# Altium PCB ESP01-S-UART_Version_1.PcbDoc
Units mm, origin at the board's own origin, x right, y up, seen from the top; angles counter-clockwise.
Board outline 45 x 45 mm, 2 copper layers (Top Layer, Bottom Layer), stack 0.97 mm thick; 62 components, 41 nets, 180 pads, 277 vias.
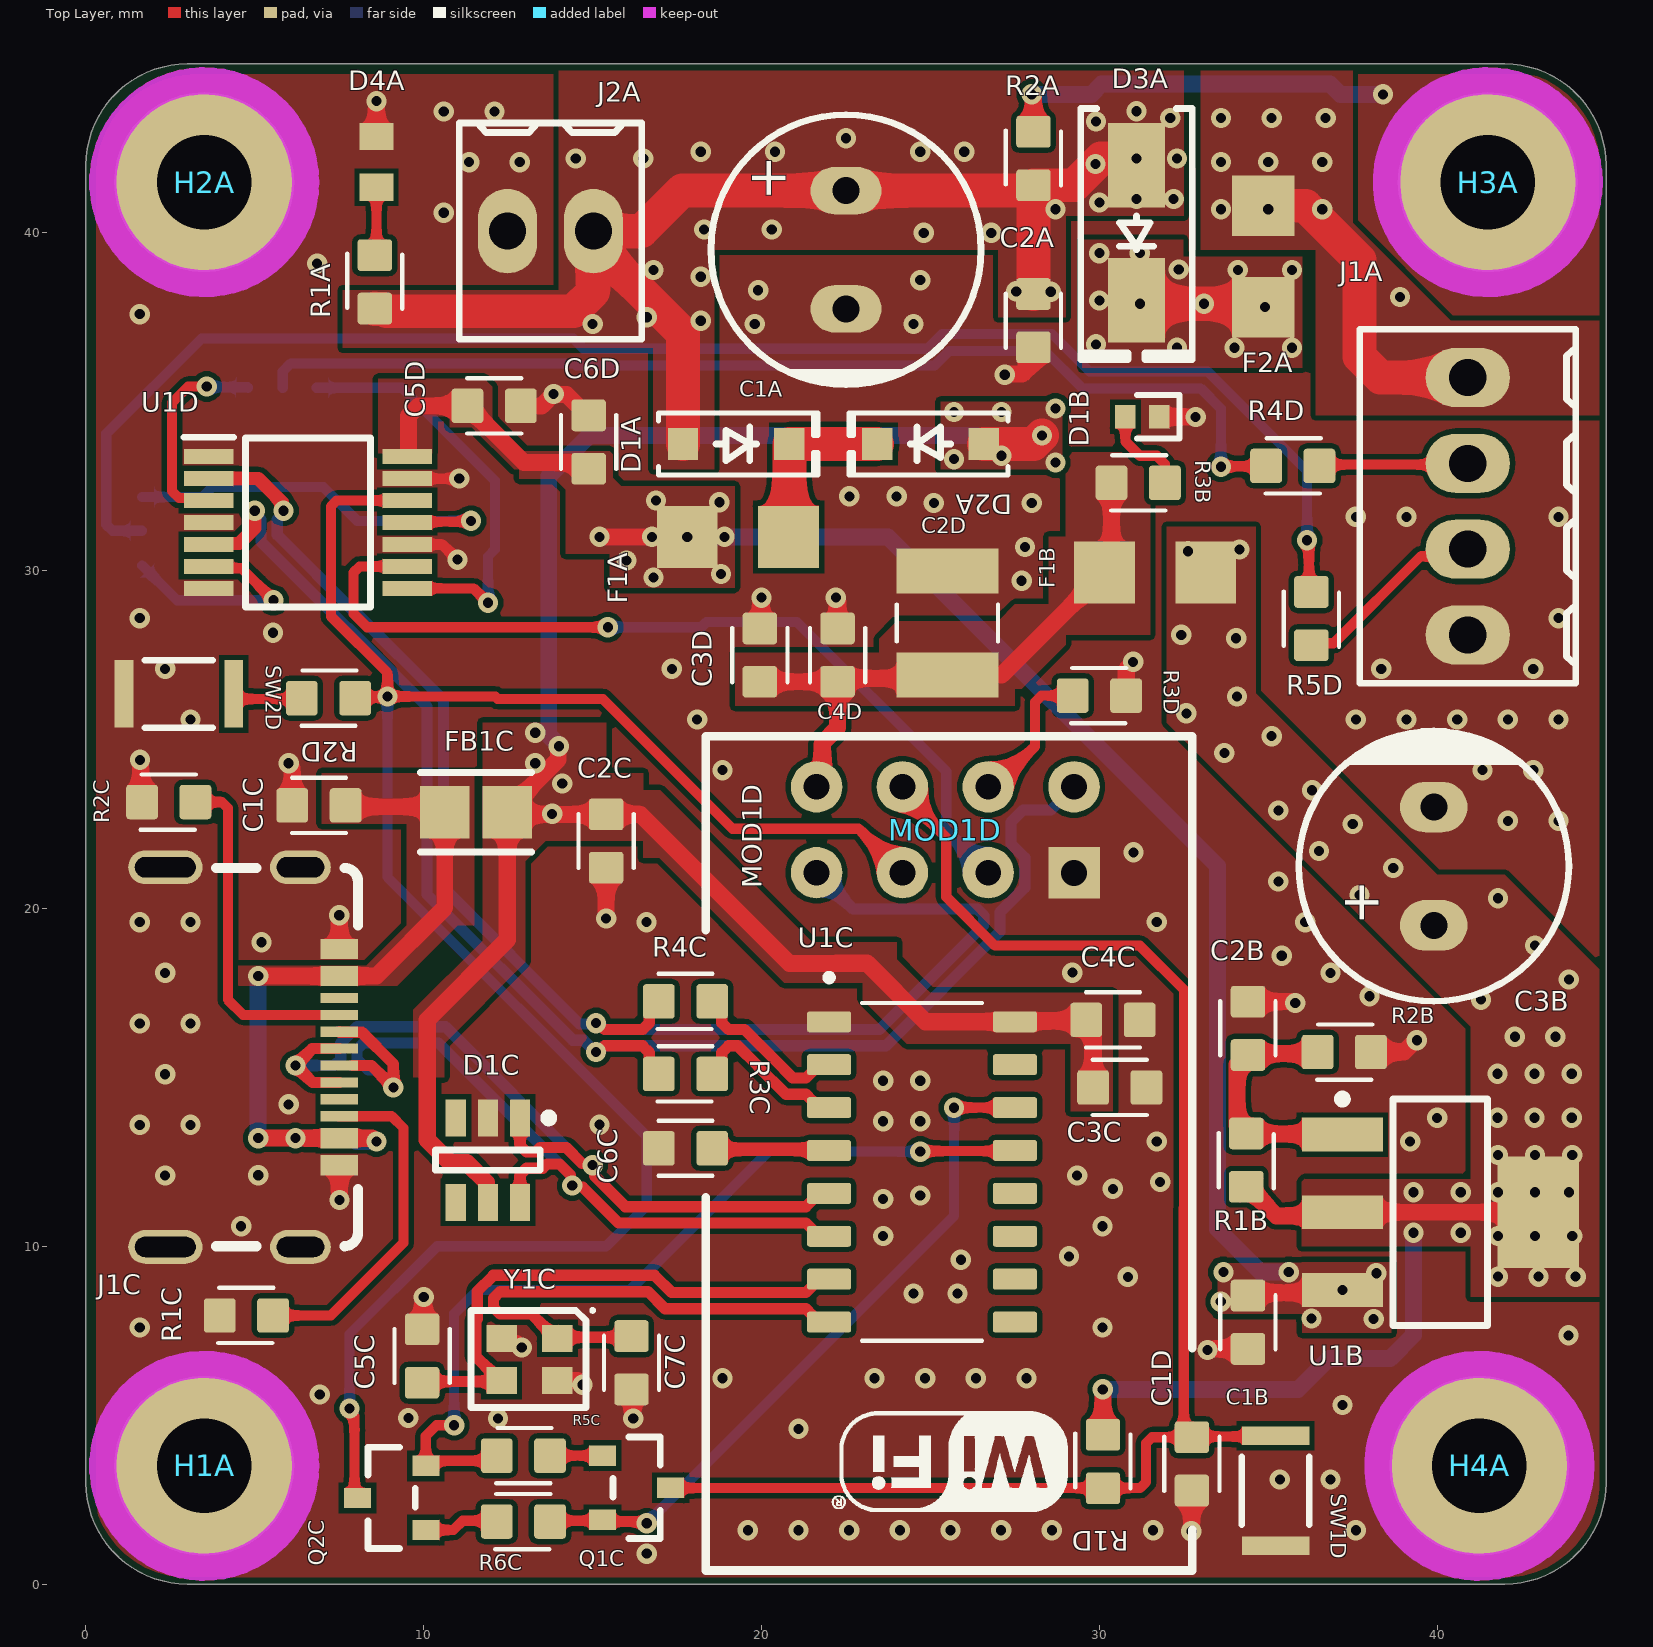
[diagram p0: Top Layer view]
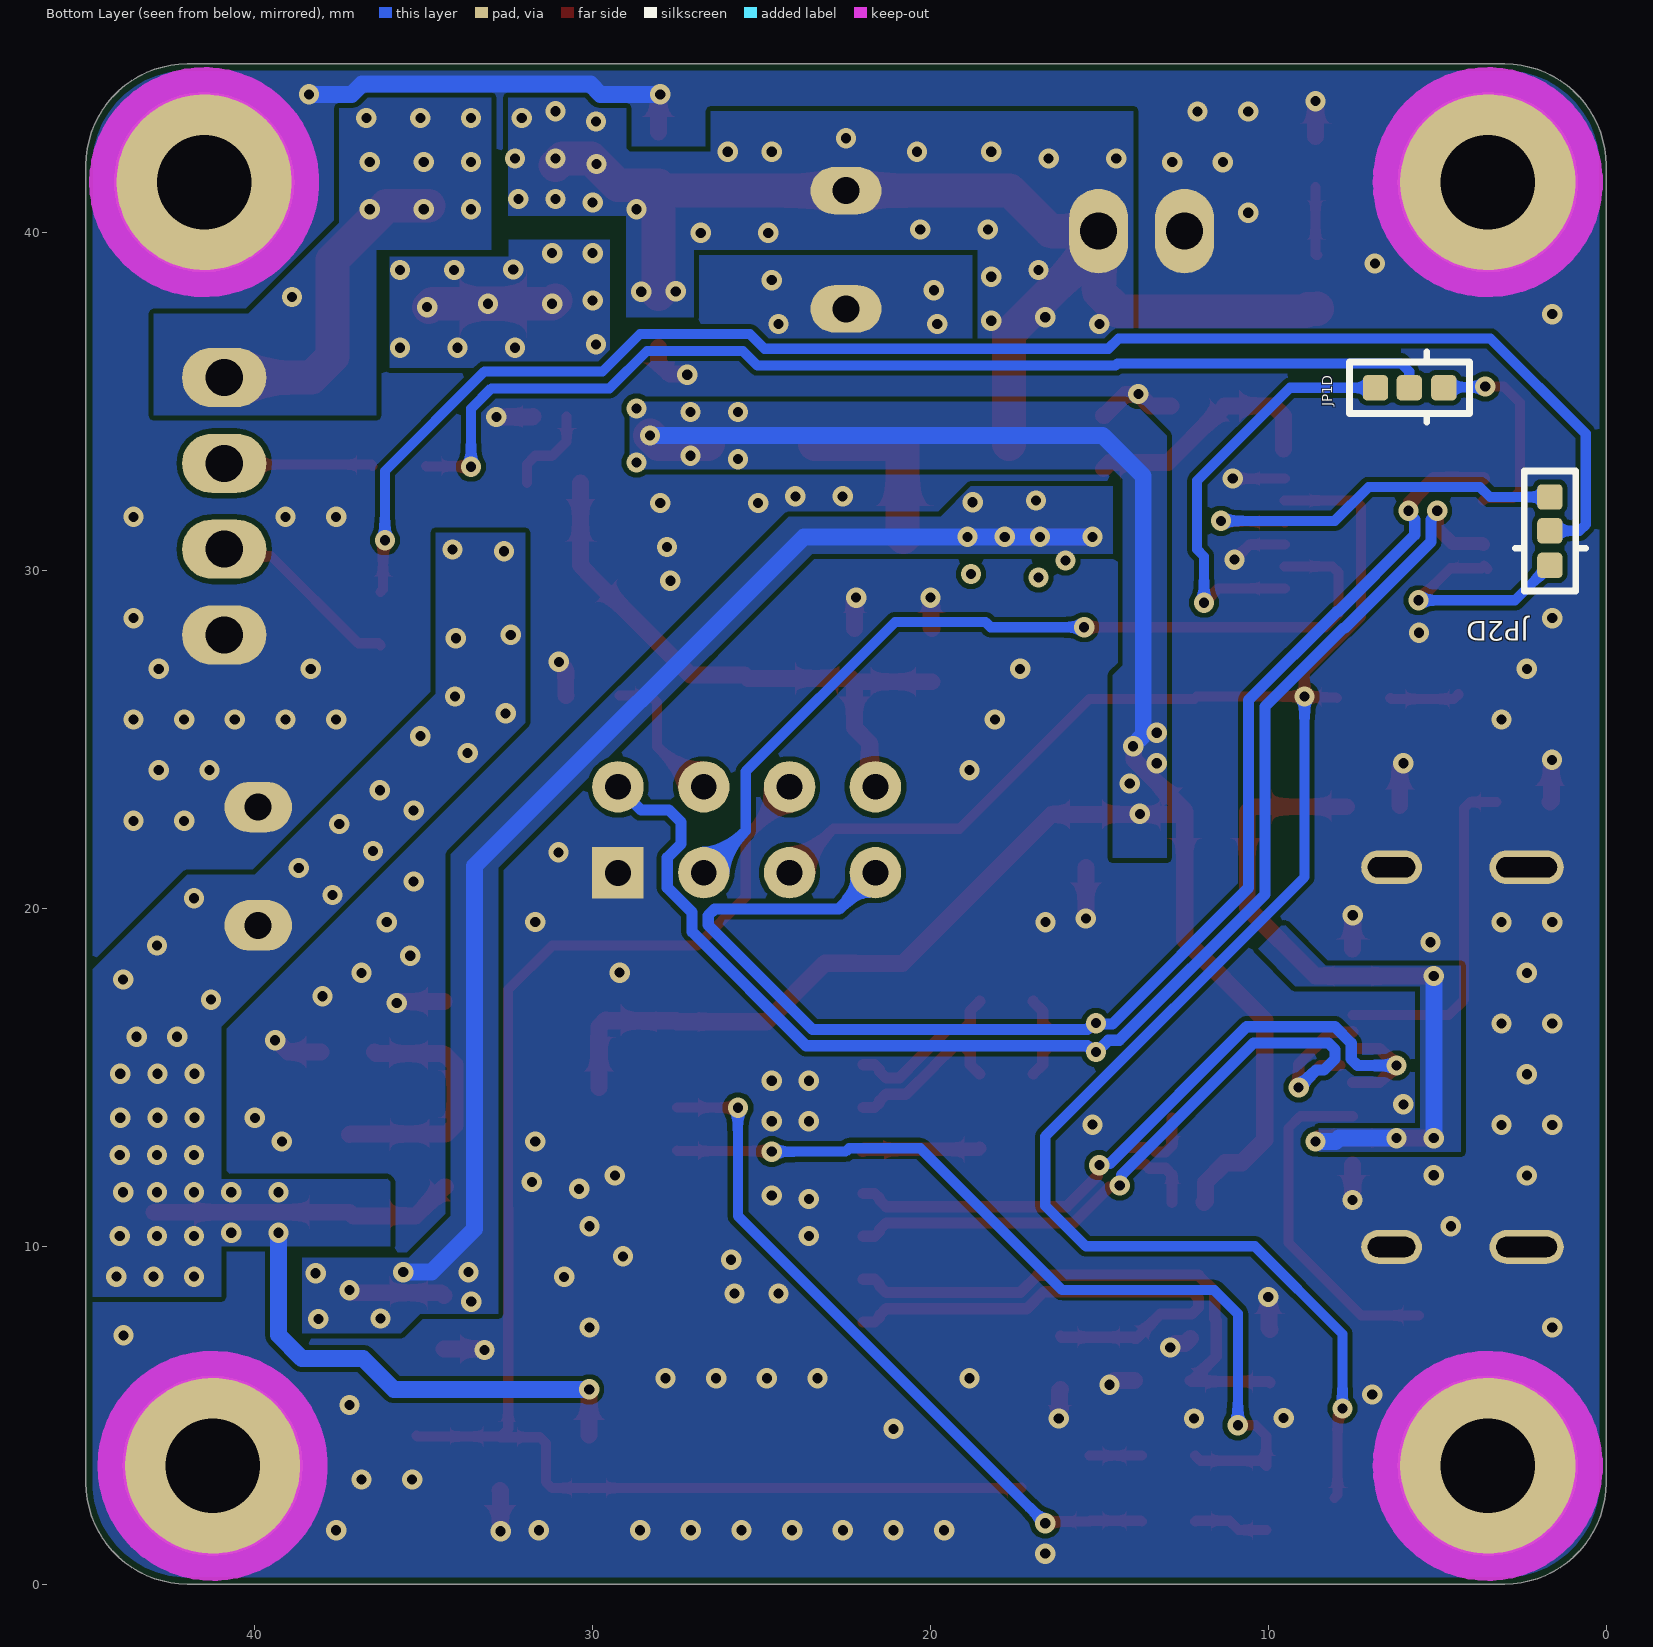
[diagram p1: Bottom Layer view, seen from below]
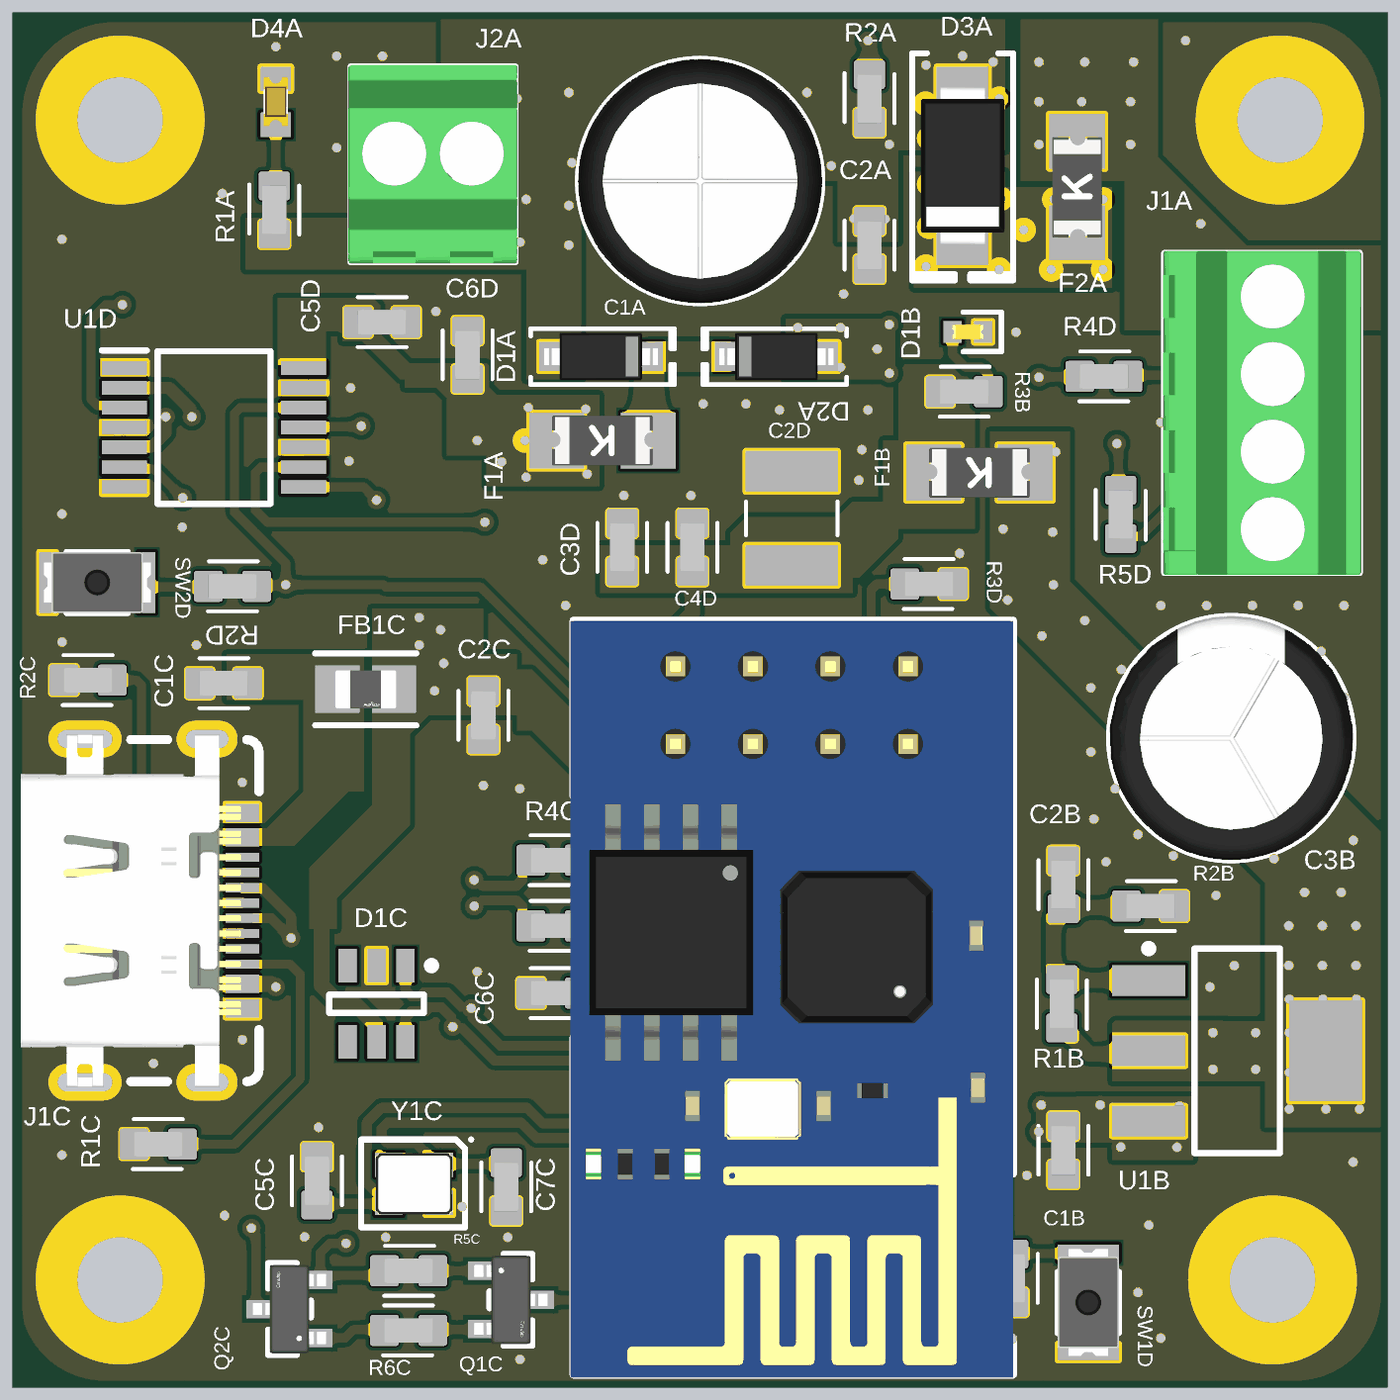
[diagram p2: 3D render of the assembled board from above, using the file's embedded part models]

## Layer stack, top to bottom
Top Solder: solder mask 0.0127, Solder Resist, Dk 3.8
Top Layer: signal copper 0.035
Dielectric: core 0.9, FR-4, Dk 4.5
Bottom Layer: signal copper 0.035
Bottom Solder: solder mask 0.0127, Solder Resist, Dk 3.8

## Board outline
0,3 0,42 cw(c3,42) 3,45 42,45 cw(c42,42) 45,42 45,3 cw(c42,3) 42,0 3,0 cw(c3,3)

## Design rules (kind name [scope] priority, off if disabled: settings)
BoardOutlineClearance [All] p1: gap=0.2 ignorepadtopadclearanceinfootprint=FALSE
Clearance [All] p1: gap=0.15 ignorepadtopadclearanceinfootprint=FALSE except(0.254: Arc-Hole Track-Hole SMDPad-Hole THPad-Hole Via-Hole Fill-Hole Poly-Hole Region-Hole Text-Hole)
ComponentClearance [All] p1: gap=0.127 collisioncheckmode=3 verticalgap=0.127 showdistances=TRUE
DiffPairsRouting [All] p1: maxlimit=0.15 minlimit=0.15 mostfreqgap=0.15 toplayer_minwidth=0.332 toplayer_maxwidth=0.332 toplayer_prefwidth=0.332 bottomlayer_minwidth=0.332 bottomlayer_maxwidth=0.332 bottomlayer_prefwidth=0.332 impedanceprofiledriven=TRUE impedanceprofileid={1F95497F-68A6-4939-A7AA-FA4C78A55AE4} impedanceprofilevalue=90.000000 maxuncoupledlength=12.7
Height [All] p1: minheight=0 maxheight=1816.048 prefheight=12.7
HoleSize [All] p1: absolutevalues=TRUE maxlimit=6.3 minlimit=0.3 maxpercent=80.000 minpercent=20.000
HoleToHoleClearance [All] p1: gap=0.254 allowstackedmicrovias=FALSE
MinimumAnnularRing [All] p1: minimumring=0.1
PlaneClearance [All] p1: clearance=0.254
PlaneConnect PlaneConnectPowerPads [InPadClass('PowerPads')] p1: planeconnectstyle=Direct reliefexpansion=0.508 reliefentries=4 reliefconductorwidth=0.254 reliefairgap=0.254
PlaneConnect [All] p2: pad.planeconnectstyle=Relief pad.reliefexpansion=0.3 pad.reliefentries=4 pad.reliefconductorwidth=0.127 pad.reliefairgap=0.127 via.planeconnectstyle=Direct via.reliefexpansion=0.3 via.reliefentries=4 via.reliefconductorwidth=0.127 via.reliefairgap=0.127
PolygonConnect PolygonConnectPowerPads [All vs (InPadClass('PowerPads'))] p1: connectstyle=Direct reliefconductorwidth=0.254 reliefentries=4 polygonreliefangle="90 Angle" airgapwidth=0.254
PolygonConnect [All] p2: connectstyle=Direct reliefconductorwidth=0.127 reliefentries=4 polygonreliefangle="90 Angle" airgapwidth=0.127
RoomDefinition 5_ESP_01 [InComponentClass('5_ESP_01')] p1: confinementstyle=ConfineIn formatcopy=TRUE lockcomponents=FALSE outline -20,-2 164,-2 164,47 -20,47
RoomDefinition 4_USB [InComponentClass('4_USB')] p2: confinementstyle=ConfineIn formatcopy=TRUE lockcomponents=FALSE outline -18,-4 174.844,-4 174.844,49 -18,49
RoomDefinition 3_LDO [InComponentClass('3_LDO')] p3: confinementstyle=ConfineIn formatcopy=TRUE lockcomponents=FALSE outline -16,-6 215,-6 215,52 -16,52
RoomDefinition 2_Input [InComponentClass('2_Input')] p4: confinementstyle=ConfineIn formatcopy=TRUE lockcomponents=FALSE outline -22,0 101.594,0 101.594,45 -22,45
RoutingVias [All] p1: holewidth=0.3 width=0.6 viastyle="Through Hole" minholewidth=0.3 minwidth=0.6 maxholewidth=0.6 maxwidth=6.6
SilkToSilkClearance [All] p1: silktosilkclearance=0.1
SilkToSolderMaskClearance [IsPad] p1: minsilkscreentomaskgap=0.15 clearancetoexposedcopper=TRUE
SolderMaskExpansion [All] p1: expansion=0.1 istentingtop=FALSE
SupplyNets "Schematic Supply Nets_2" [InNetClass('GND')] p1: voltage=0.000
SupplyNets "Schematic Supply Nets_1" [InNetClass('Power')] p2: voltage=0.000
SupplyNets "Schematic Supply Nets" [InNetClass('High_Power')] p3: voltage=0.000
Width High_Power [InNetClass('High_Power')] p1: maxlimit=1.5 minlimit=1 preferedwidth=1
Width Power [InNetClass('Power')] p2: maxlimit=1 minlimit=0.5 preferedwidth=0.5
Width GND [InNetClass('GND')] p3: maxlimit=1.5 minlimit=0.3 preferedwidth=0.5
Width Signal [InNetClass('Signal')] p4: maxlimit=0.3 minlimit=0.3 preferedwidth=0.3
21 further rules are at their usual default settings.

## Classes and differential pairs
net class High_Power: FUSED_LED LED-OUT SUPPLY_IN
differential pair class DIFF_PAIR: RXD_TXD TXD_RXD USB_2.0 XI-XO
net class USB_DATA: USB_2.0_N USB_2.0_P
net class UART: RXD_TXD_N RXD_TXD_P TXD_RXD_N TXD_RXD_P
net class Signal: CH_PD CLOCK_TTL DATA_TTL DTS GPIO0 GPIO0_LED_TTL GPIO2 GPIO2_LED_TTL LED_CLOCK_OUT LED_DATA_OUT NetD1B_A NetD4A_A NetJ1C_A5 NetJ1C_B5 NetR2D_1 RST RTS RX_LED_TTL TX_LED_TTL
net class Power: Adjust FUSED_VCC LDO+3.3V LDO-OUT-1117 VBUS VBUS_IN VCC
net class GND: GND
net class CRYSTAL: XI-XO_N XI-XO_P
component class 5_ESP_01: C1D C2D C3D C4D C5D C6D JP1D JP2D MOD1D R1D R2D R3D R4D R5D SW1D SW2D U1D
component class 4_USB: C1C C2C C3C C4C C5C C6C C7C D1C FB1C J1C Q1C Q2C R1C R2C R3C R4C R5C R6C U1C Y1C
component class 3_LDO: C1B C2B C3B D1B F1B R1B R2B R3B U1B
component class 2_Input: C1A C2A D1A D2A D3A D4A F1A F2A H1A H2A H3A H4A J1A J2A R1A R2A
differential pair XI-XO: +XI-XO_P -XI-XO_N
differential pair USB_2.0: +USB_2.0_P -USB_2.0_N
differential pair TXD_RXD: +TXD_RXD_P -TXD_RXD_N
differential pair RXD_TXD: +RXD_TXD_P -RXD_TXD_N

## Components (designator, comment, footprint, x,y, rotation, side; value= is the part's Value field where it differs from the comment)
C1A "1000µF/10V" "CAP TH ALUM ELEC D8.00mm S3.50mm H13.00mm" 22.5,39.5 r90 top
C1B "10uF" C-0603 34.4,7.75 r90 top
C1C "10nF" C-0603 6.897,23.05 r0 top
C1D "0.1uF" C-0603 32.74,3.557 r270 top
C2A "0.1uf" C-0603 28.05,37.4 r90 top
C2B "10uF" C-0603 34.4,16.45 r270 top
C2C "100nf" C-0603 15.4,21.997 r90 top
C2D "100uF" 1411-3528 25.5,28.45 r90 top
C3B "1000 µF/6.3V" "CAP AL TH D8 L3.5 H12.5" 39.9,21.25 r90 top
C3C "100nF" C-0603 30.603,14.7 r180 top
C3D "0.1uf" C-0603 19.95,27.5 r270 top
C4C "100nF" C-0603 30.403,16.7 r180 top
C4D "1uf" C-0603 22.25,27.5 r270 top
C5C "22pF" C-0603 9.95,6.75 r90 top
C5D "0.1uF" C-0603 12.084,34.879 r180 top
C6C "100nF" C-0603 17.75,12.9 r0 top
C6D "10uF" C-0603 14.882,33.806 r270 top
C7C "22pF" C-0603 16.15,6.55 r270 top
D1A "1N5819HW-7-F" SOD-123 19.25,33.75 r0 top
D1B "YELLOW" LED_0402_YELLOW 31.271,34.558 r0 top
D1C "SRV05-4.TCT" SMTC-SOT23-6_V 11.9,12.55 r270 top
D2A "1N5819HW-7-F" SOD-123 25,33.75 r180 top
D3A "SS34-HF" "DO214AC SMA" 31.1,40 r270 top
D4A "RED" LED_0603_RED 8.6,42.1 r270 top
F1A "1A" FUSE_1206 19.3,31 r180 top
F1B "1A" FUSE_1206 31.65,29.95 r180 top
F2A "5A" FUSE_1206 34.85,39.3 r90 top
FB1C "500mA,100mhz,600ohm" FP-BLM21-0_2-t0_85-e0_5-IPC_A 11.547,22.85 r0 top
H1A "MOUNTING PAD, round" 2,8-PAD#1 3.5,3.5 r0 top
H2A "MOUNTING PAD, round" 2,8-PAD#1 3.5,41.5 r0 top
H3A "MOUNTING PAD, round" 2,8-PAD#2 41.5,41.5 r0 top
H4A "MOUNTING PAD, round" 2,8-PAD#1 41.25,3.5 r0 top
J1A "282834-4" "TE 282834-4" 40.907,31.906 r270 top
J1C "USB4510-03-1-A" USB4510-03-1-A 4.35,15.6 r270 top
J2A "282834-2" "TE 282834-2" 13.75,40.05 r0 top
JP1D "Solder Pad" Solder_Pad_3_Pin_NC_Medium 5.825,35.413 r180 bottom
JP2D "Solder Pad" Solder_Pad_3_Pin_NC_Medium 1.662,31.18 r270 bottom
MOD1D "ESP8266 ESP-01" "ESP8266 ESP-01" 32.75,25.1 r180 top
Q1C "SS8050-G" FP-SS8050-G-MFG 16.3,2.85 r0 top
Q2C "SS8050-G" FP-SS8050-G-MFG 9.05,2.55 r180 top
R1A "1.8K" R-0603 8.55,38.55 r90 top value=10K
R1B "82K" R-0603 34.35,12.55 r270 top value=10K
R1C "5.1K" R-0603 4.75,7.95 r180 top value=10K
R1D "12K" R-0603 30.108,3.626 r90 top value=10K
R2A "5k" R-0603 28.05,42.2 r90 top value=10K
R2B "50K" R-0603 37.25,15.75 r0 top value=10K
R2C "5.1K" R-0603 2.45,23.15 r180 top value=10K
R2D "470R" R-0603 7.179,26.225 r0 top value=10K
R3B "1.8K" R-0603 31.15,32.6 r0 top value=10K
R3C "470R" R-0603 17.75,15.1 r180 top value=10K
R3D "12K" R-0603 30,26.3 r180 top value=10K
R4C "470R" R-0603 17.75,17.25 r180 top value=10K
R4D "33R" R-0603 35.725,33.1 r0 top value=10K
R5C "12K" R-0603 12.95,3.8 r0 top value=10K
R5D "33R" R-0603 36.276,28.581 r270 top value=10K
R6C "12K" R-0603 12.95,1.85 r180 top value=10K
SW1D "EVP-AWED4A" "PANASONIC EVPAW" 35.216,2.763 r270 top
SW2D "EVP-AWED4A" "PANASONIC EVPAW" 2.75,26.35 r180 top
U1B "AMS1117MP-ADJ" MP04A_N 40.094,11.007 r0 top
U1C "CH340G" SOIC127P600X180-16N 24.75,12.2 r0 top
U1D "74VHCT125PW,118" SOP65P640X110-14N 6.575,31.425 r0 top
Y1C "12MHz" "ABRACON ABM10" 13.13,6.65 r180 top

## Footprints (in the part's own frame and the unit in brackets; to place one, negate y for a bottom-side part, rotate by r counter-clockwise, add the part's x,y. Pads: shape width x height; smd on the part's side, far side on the other; paste and mask are expansions set on the pad)
2,8-PAD#1 [mil]
  round 210 hole 110.24: 1(0,0)
  Top Layer keep-out circle w32: c0,0 r118.11
  Top Layer keep-out circle w32: c0,0 r118.11
  Bottom Layer keep-out circle w32: c0,0 r118.11
2,8-PAD#2 [mil]
  round 210 hole 110.24 mask+3.94: 1(0,0)
  Top Layer keep-out circle w32: c0,0 r118.11
  Top Layer keep-out circle w32: c0,0 r118.11
  Bottom Layer keep-out circle w32: c0,0 r118.11
1411-3528 [mm]
  rect 1.34x3.02 smd: 1(-1.54,0) 2(1.54,0)
  silkscreen extent -0.55,-1.5 0.55,1.5
"ABRACON ABM10" [mm] "Crystal, 4-Leads, Body 2.00x2.45mm, Pitch 1.65mm, IPC Medium Density"
  rect 0.9x0.8 smd: 1(-0.825,-0.625) 2(0.825,-0.625) 3(0.825,0.625) 4(-0.825,0.625)
  silkscreen extent -1.92,-1.5 1.73,1.42, body extent -1.27,-1.02 1.28,1.03, height 0.5
C-0603 [mm]
  rrect20% 0.94x1.02 smd mask+0.05: 1(-0.79,0) 2(0.79,0)
  silkscreen extent -0.8,-0.82 0.8,0.82, body extent -0.8,-0.4 0.8,0.4, height 0.23
"CAP AL TH D8 L3.5 H12.5" [mm] "8MM Diameter, 3.5MM Lead Spacing Aluminium Capacitor"
  oval 1.5x2 hole 0.8: 1(-1.75,0) 2(1.75,0)
  silkscreen extent -4,-4 4,4, body extent -4,-4 4,4, height 11.5
"CAP TH ALUM ELEC D8.00mm S3.50mm H13.00mm" [mm] "8mm Diameter 3.5mm Lead Spacing Aluminum Electrolytic Capacitors Radial, Can"
  oval 1.4x2.1 hole 0.8: 1(1.75,0) 2(-1.75,0)
  silkscreen extent -4,-4 4,4, body extent -4.01,-4 4,4, height 13
"DO214AC SMA" [mm] "Molded Diode, 2-Leads, Body 4.30x2.60mm, IPC Medium Density"
  rect 2.5x1.7 smd: 1(-2,0) 2(2,0)
  silkscreen extent -3.68,-1.65 3.75,1.65, body extent -2.6,-1.37 2.6,1.37, height 2.4
"ESP8266 ESP-01" [mil] "ESP8266 ESP-01"
  rect 60x60 hole 30: 1(137.78,159.43)
  round 60 hole 30: 2(237.8,159.06) 3(337.8,159.06) 4(437.8,159.06) 5(137.79,59.06) 6(237.8,59.06) 7(337.8,59.06) 8(437.8,59.06)
  silkscreen extent 0,0 567,972, body extent 0,0 571,976, height 12
FP-BLM21-0_2-t0_85-e0_5-IPC_A [mm]
  rect 1.455x1.556 smd paste+0 mask+0: 1(-0.926,0) 2(0.926,0)
  silkscreen extent -1.65,-1.18 1.65,1.18, body extent -2.15,-1.28 2.15,1.28, height 0.25
FP-SS8050-G-MFG [mm]
  rect 0.8x0.6 smd paste+0 mask+0: 1(-1.01,0.95) 2(-1.01,-0.95) 3(1.01,0)
  silkscreen extent -0.7,-1.5 0.7,1.5, body extent -1.51,-1.6 1.51,1.6, height 0.25
FUSE_1206 [mm]
  rect 1.8x1.84 smd: 1(-1.5,0) 2(1.5,0)
  body extent -1.65,-0.82 1.65,0.81, height 0.84
LED_0402_YELLOW [mm]
  rect 0.6x0.7 smd: A(-0.5,0) K(0.5,0)
  silkscreen extent -0.15,-0.65 1.1,0.65, body extent -0.51,-0.25 0.51,0.25, height 0.45
LED_0603_RED [mm]
  rect 0.8x1 smd: A(0.75,0) K(-0.75,0)
  body extent -0.8,-0.4 0.8,0.4, height 0.6
MP04A_N [mm] "SOT223, 4-Leads, Body 6.5x3.5mm, Pitch 2.3mm, Lead Span 7mm, IPC Medium Density"
  rect 2.4x1 smd: 1(-2.9,2.3) 2(-2.9,0) 3(-2.9,-2.3)
  rect 2.4x3.3 smd: 4(2.9,0)
  silkscreen extent -3.02,-3.35 1.4,3.47, body extent -1.86,-3.35 1.86,3.35, height 1.8
"PANASONIC EVPAW" [mm]
  rect 0.55x2 smd: 1(-1.625,0) 2(1.625,0)
  silkscreen extent -1,-1 1,1, body extent -1.75,-1 1.75,1, height 0.58
R-0603 [mm]
  rrect20% 0.94x1.02 smd mask+0.05: 1(-0.79,0) 2(0.79,0)
  silkscreen extent -0.8,-0.82 0.83,0.82, body extent -0.8,-0.4 0.8,0.4, height 0.23
SMTC-SOT23-6_V [mm] "SOT23, 6-Leads, Body 3.15x1.7mm, Pitch 0.95mm"
  rect 1.1x0.6 smd: 1(-1.25,0.95) 2(-1.25,0) 3(-1.25,-0.95) 4(1.25,-0.95) 5(1.25,0) 6(1.25,0.95)
  silkscreen extent -1.37,-1.55 0.3,1.93, body extent -0.87,-1.55 0.87,1.55, height 1.45
SOD-123 [mm] "SOD, 2-Leads, Body 1.55x3.70mm, IPC Medium Density"
  rect 0.9x0.95 smd: 1(-1.575,0) 2(1.575,0)
  silkscreen extent -2.3,-0.92 2.41,0.92, body extent -1.86,-0.78 1.86,0.77, height 1.35
SOIC127P600X180-16N [mm]
  rrect25% 1.31x0.62 smd: 1(-2.75,4.445) 2(-2.75,3.175) 3(-2.75,1.905) 4(-2.75,0.635) 5(-2.75,-0.635) 6(-2.75,-1.905) 7(-2.75,-3.175) 8(-2.75,-4.445) 9(2.75,-4.445) 10(2.75,-3.175) 11(2.75,-1.905) 12(2.75,-0.635) 13(2.75,0.635) 14(2.75,1.905) 15(2.75,3.175) 16(2.75,4.445)
  silkscreen extent -2.85,-5 1.78,5.85
Solder_Pad_3_Pin_NC_Medium [mm]
  rrect35% 0.75x0.75 smd mask+0: 1(-1,0) 2(0,0) 3(1.024,0)
  silkscreen extent -1.77,-1.02 1.79,1.06
SOP65P640X110-14N [mm]
  rect 1.475x0.45 smd: 1(-2.938,1.95) 2(-2.938,1.3) 3(-2.938,0.65) 4(-2.938,0) 5(-2.938,-0.65) 6(-2.938,-1.3) 7(-2.938,-1.95) 8(2.938,-1.95) 9(2.938,-1.3) 10(2.938,-0.65) 11(2.938,0) 12(2.938,0.65) 13(2.938,1.3) 14(2.938,1.95)
  silkscreen extent -3.67,-2.5 1.85,2.52
"TE 282834-2" [mm]
  oval 1.75x2.5 hole 1.1: 1(-1.27,0) 2(1.27,0)
  silkscreen extent -2.7,-3.2 2.7,3.2, body extent -2.77,-3.25 2.77,3.25, height 10
"TE 282834-4" [mm]
  oval 1.75x2.5 hole 1.1: 1(-3.81,0) 2(-1.27,0) 3(1.27,0) 4(3.81,0)
  silkscreen extent -5.24,-3.2 5.24,3.2, body extent -5.31,-3.25 5.31,3.25, height 10
USB4510-03-1-A [mm]
  rect 0.6x1.1 smd: A1B12(-3.2,3.15) A4B9(-2.4,3.15) B1A12(3.2,3.15) B4A9(2.4,3.15)
  rect 0.3x1.1 smd: A5(-1.25,3.15) A6(-0.25,3.15) A7(0.25,3.15) A8(1.25,3.15) B5(1.75,3.15) B6(0.75,3.15) B7(-0.75,3.15) B8(-1.75,3.15)
  oval 1x1.8 hole 0.6 slot 1.4 at 90 deg: SH(-5.62,2) SH(5.62,2)
  oval 1x2.2 hole 0.6 slot 1.8 at 90 deg: SH(-5.62,-2) SH(5.62,-2)
  silkscreen extent -5.6,-0.5 5.6,3.7, body extent -5.77,-4.1 5.77,3.1, height 1.57

## Part data
C1A: library part 10PK1000MEFC8X11.5, "CAP ALUM 1000UF 20% 10V RADIAL", Capacitance=1000µF, Device Package="Radial, Can", Lifetime @ Temp.="2000 Hrs @ 85°C", manufacturer=Rubycon, Operating Temperature="-40°C ~ 85°C", Ripple Current @ High Frequency="792mA @ 10kHz", Ripple Current @ Low Frequency="660mA @ 120Hz", Supplier Part Number 1=1189-1050-ND, Tolerance=±20%, Voltage - Rated=10V, Applications="General Purpose", componentlink1description=Datasheet, componentlink1url=http://www.rubycon.co.jp/en/catalog/e_pdfs/aluminum/e_pk.pdf, componentlink2description="DigiKey Link", componentlink2url=http://digikey.com/product-detail/en/rubycon/10PK1000MEFC8X11.5/1189-1050-ND/3133980, Height - Seated (Max)="0.512\" (13.00mm)", lastupdated="07-09-2020 05:24:54 AM", Lead Spacing="0.138\" (3.50mm)", Lifecycle Status=Active, Minimum Order=1, Mounting Type="Through Hole", Package / Case="Radial, Can", packaging=Bulk, Part Number=10PK1000MEFC8X11.5, Part Status=Active, partid=23938, Polarization=Polar, price=0.34, series=PK, Size / Dimension="0.315\" Dia (8.00mm)", Supplier 1=DigiKey
C1B C1C C1D C2A C2B C2C C3C C3D C4C C4D C5C C5D C6C C6D C7C: library part C-0603, "Ceramic Capacitor 16V 0603 (1608 Metric)", Package="0603 KEMET", Availability=Warning, Check_prices=https://www.snapeda.com/parts/C0603C104J4RAC/KEMET/view-part/1763758/?ref=eda, MF=KEMET, MP=C0603C104J4RAC, price=None, SnapEDA_Link=https://www.snapeda.com/parts/C0603C104J4RAC/KEMET/view-part/1763758/?ref=snap
C2D: library part "C-1411 (3528 Metric)", "Molded Tantalum Capacitors 16V 1411 (3528 Metric)", Package="1411 KEMET", Availability=Unavailable, MF=KEMET, MP=T495B106K025ATE750, price=None, SnapEDA_Link=https://www.snapeda.com/parts/T495B106K025ATE750/KEMET/view-part/1680496/?ref=snap
C3B: library part ECA-0JHG102, "CAP ALUM 1000UF 20% 6.3V RADIAL", Capacitance="1000 µF", Device Package="Radial, Can", Lifetime @ Temp.="1000 Hrs @ 105°C", manufacturer="Panasonic Electronic Components", Operating Temperature="-55°C ~ 105°C", Ripple Current @ High Frequency="437 mA @ 100 kHz", Ripple Current @ Low Frequency="380 mA @ 120 Hz", Supplier Part Number 1=P5509-ND, Tolerance=±20%, Voltage - Rated="6.3 V", Applications="General Purpose", componentlink1description=Datasheet, componentlink1url=https://industrial.panasonic.com/cdbs/www-data/pdf/RDF0000/ABA0000C75.pdf, componentlink2description="DigiKey Link", componentlink2url=https://www.digikey.com/en/products/detail/panasonic-electronic-components/ECA-0JHG102/245108, Height - Seated (Max)="0.492\" (12.50mm)", lastupdated="27-12-2022 10:20:14 PM", Lead Spacing="0.138\" (3.50mm)", Lifecycle Status=Active, Minimum Order=1, Mounting Type="Through Hole", Package / Case="Radial, Can", packaging=Bulk, Part Number=ECA-0JHG102, Part Status=Active, partid=7190, Polarization=Polar, price=0.15, series=NHG-A, Size / Dimension="0.315\" Dia (8.00mm)", Supplier 1=DigiKey
D1A D2A: "DIODE SCHOTTKY 40V 1A SOD123", Capacitance @ Vr, F="60pF @ 4V, 1MHz", Current - Average Rectified (Io)=1A, Current - Reverse Leakage @ Vr="1mA @ 40V", manufacturer="Diodes Incorporated", Operating Temperature - Junction="-65°C ~ 125°C", Package / Case=SOD-123, Supplier Part Number 1=1N5819HW-FDICT-ND, Voltage - DC Reverse (Vr) (Max)=40V, Voltage - Forward (Vf) (Max) @ If="450mV @ 1A", componentlink1description=Datasheet, componentlink1url=https://www.diodes.com/assets/Datasheets/ds30217.pdf, componentlink2description="DigiKey Link", componentlink2url=http://digikey.com/product-detail/en/diodes-incorporated/1N5819HW-7-F/1N5819HW-FDICT-ND/815283, Diode Type=Schottky, lastupdated="19-09-2022 13:46:25", Lifecycle Status=Active, Minimum Order=1, Mounting Type="Surface Mount", packaging=TapeAndReel, Part Number=1N5819HW-7-F, Part Status=Active, partid=2212, price=0.08, series=-, Speed="Fast Recovery =< 500ns, > 200mA (Io)", Supplier 1=DigiKey, Supplier Device Package=SOD-123
D1B: library part LED_0402_YELLOW, "LED 0402 YELLOW SMD"
D1C: library part CMP-2000-05358-1, "RailClamp(R) Low Capacitance TVS Diode Array, 5 pF, 17.5 VC, -55 to 125 degC, 6-Pin SOT23, RoHS, Tape and Reel", Capacitance Value=5pF, Clamping Voltage=17.5V, Clamping Voltage (Max)=12.5V, Leakage Current=5uA, manufacturer=Semtech, Operating Temp Range=-55Cto125C, Operating Temperature Classification=Military, Operating Temperature Max Deg. C=125C, Operating Temperature Min Deg. C=-55C, Package / Case=SOT-23, Package Description="6-Pin Small Outline Transistor, Body 2.9 x 1.6 mm, Pitch 0.95 mm", Package Reference=SOT23-6, Peak Pulse Current=12A, Peak Pulse Power Dissipation=300W, Reverse Breakdown Voltage=6V, Reverse Stand-off Voltage=5V, Test Current (It)=1mA, Configuration=Quad, Datasheet URL=https://datasheet.ciiva.com/8029/srv05-4-8029973.pdf, Datasheet Version=Jan-08, Direction Type=Uni-Directional, Leakage Current (Max)=5uA, Manufacturer URL=http://www.semtech.com/, Mounting=SurfaceMount, Mounting Style=SurfaceMount, Number of Elements=1, packaging=TapeandReel, Pin Count=6, Polarity=Uni-Directional, Product Depth (mm)=1.6mm, Product Height (mm)=1.15mm, Product Length (mm)=2.9mm, Rad Hardened=No, Suppressor Type=DiodeArrays, Working Voltage=5V, Working Voltage (Max)=5V
D3A: "DIODE SCHOTTKY 40V 3A DO214AC SM", Capacitance @ Vr, F="450pF @ 4V, 1MHz", Current - Average Rectified (Io)=3A, Current - Reverse Leakage @ Vr="500 µA @ 40 V", manufacturer="Comchip Technology", Operating Temperature - Junction="-55°C ~ 125°C", Package / Case="DO-214AC, SMA", Supplier Device Package="DO-214AC (SMA)", Supplier Part Number 1=641-2115-1-ND, Voltage - DC Reverse (Vr) (Max)="40 V", Voltage - Forward (Vf) (Max) @ If="550 mV @ 3 A", componentlink1description=Datasheet, componentlink1url=http://www.comchiptech.com/admin/files/product/20190514101641.pdf, componentlink2description="DigiKey Link", componentlink2url=https://www.digikey.com/en/products/detail/comchip-technology/SS34-HF/10279693, Diode Type=Schottky, lastupdated="19-09-2022 01:46:08 PM", Lifecycle Status=Active, Minimum Order=1, Mounting Type="Surface Mount", packaging=TapeAndReel, Part Number=SS34-HF, Part Status=Active, partid=2138, price=0.07, series=-, Speed="Fast Recovery =< 500ns, > 200mA (Io)", Supplier 1=DigiKey
D4A: library part LED_0603_RED, "LED 0603 RED SMD"
F1A F1B F2A: library part FUSE_PPTC_1206, "Fuse PPTC SMD 1206"
FB1C: library part CMP-0686-00646-3, "BLM21BB121SN1D", Case Code (Imperial)=0805, Case Code (Metric)=2012, Current Rating=600mA, DC Resistance (DCR)=190mR, DC Resistance-Max=250mR, Frequency=100MHz, Max DC Current=200mA, Max Operating Temperature=125°C, Min Operating Temperature=-55°C, Package Quantity=1, Tolerance=25%, Case/Package=0805, Contact Plating=Tin, Core Material=Ferrite, Depth=1.45mm, Height=0.85mm, Impedance=120R, Lead Free="Lead Free", Length=2mm, Material=Ferrite, Max Current Rating=600mA, Number of Circuits=1, Number of Lines=1, Number of Pins=2, packaging="Tape and Reel", REACH SVHC="No SVHC", RoHS Compliant=Yes, series=BLM21B, Shielding=Unshielded, Termination=SMD/SMT, Test Frequency=100MHz, Weight=0.000194oz, Width=1.25mm
H1A H2A H3A H4A: library part MOUNT-PAD-ROUND2.8, Package=2,8-PAD, DeviceName=2.8, DeviceSetName=MOUNT-PAD-ROUND, GateName_1=G$1, LibraryName=Holes-Custom, POPULARITY=6, SymbolName_1=MOUNT-PAD
J1A: "TERM BLK 4P SIDE ENT 2.54MM PCB", Color=Green, Current=10A, manufacturer="TE Connectivity AMP Connectors", Supplier Part Number 1=A98335-ND, Voltage=150V, componentlink1description=Datasheet, componentlink1url=https://www.te.com/commerce/DocumentDelivery/DDEController?Action=srchrtrv&DocNm=282834&DocType=Customer+Drawing&DocLang=English, componentlink2description="DigiKey Link", componentlink2url=http://digikey.com/product-detail/en/te-connectivity-amp-connectors/282834-4/A98335-ND/1153265, lastupdated="15-01-2020 04:16:05 AM", Lifecycle Status=Active, Mating Orientation="Horizontal with Board", Minimum Order=1, Mounting Type="Through Hole", Number of Levels=1, packaging=Bulk, Part Number=282834-4, Part Status=Active, Pitch="0.100\" (2.54mm)", Positions Per Level=4, price=2.68, series=Buchanan, Supplier 1=DigiKey, Wire Gauge="16-30 AWG", Wire Termination="Screw - Rising Cage Clamp"
J1C: "USB Connector Type C SMT Mid-Mount 16 Pin", manufacturer=GCT, Manufacturer Part Number=USB4510-03-1-A
J2A: "TERM BLK 2P SIDE ENT 2.54MM PCB", Color=Green, Current=10A, manufacturer="TE Connectivity AMP Connectors", Supplier Part Number 1=A98333-ND, Voltage=150V, componentlink1description=Datasheet, componentlink1url=https://www.te.com/commerce/DocumentDelivery/DDEController?Action=srchrtrv&DocNm=282834&DocType=Customer+Drawing&DocLang=English, componentlink2description="DigiKey Link", componentlink2url=http://digikey.com/product-detail/en/te-connectivity-amp-connectors/282834-2/A98333-ND/1150135, lastupdated="15-01-2020 04:15:38 AM", Lifecycle Status=Active, Mating Orientation="Horizontal with Board", Minimum Order=1, Mounting Type="Through Hole", Number of Levels=1, packaging=Bulk, Part Number=282834-2, Part Status=Active, Pitch="0.100\" (2.54mm)", Positions Per Level=2, price=0.88, series=Buchanan, Supplier 1=DigiKey, Wire Gauge="16-30 AWG", Wire Termination="Screw - Rising Cage Clamp"
JP1D JP2D: library part Solder_Pad_3_Pin_NC_Medium, "Solder Pad 3 Pin NC 1.016 mm Pitch"
Q1C Q2C: library part CMP-20235-000001-1, "NPN TRANSISTOR 1.5A 40V SOT-23 R", Case/Package=TO-236-3, Collector Emitter Breakdown Voltage=25V, Collector Emitter Voltage (VCEO)=400mV, Max Collector Current=1.5A, Max Power Dissipation=300mW, Transition Frequency=100MHz, Max Breakdown Voltage=25V, Mount="Surface Mount", packaging="Tape and Reel", RoHS Compliant=Yes
R1A R1B R1C R1D R2A R2B R2C R2D R3B R3C R3D R4C R4D R5C R5D R6C: library part R-0603, "0603", Power_Rating=".1 W", Resistance=10K, Tolerance=1%, Availability=Warning, Check_prices=https://www.snapeda.com/parts/2-1623703-0/TE%20Connectivity/view-part/2213192/?ref=eda, MF="TE Connectivity", MP=2-1623703-0, Package=0603, price=None, SnapEDA_Link=https://www.snapeda.com/parts/2-1623703-0/TE%20Connectivity/view-part/2213192/?ref=snap
SW1D SW2D: "3.0MM X 2.0MM / 3.3N / 0.15MM ST", Contact Rating @ Voltage="0.02A @ 15VDC", manufacturer="Panasonic Electronic Components", Operating Force=330gf, Operating Temperature="-40°C ~ 85°C", Supplier Part Number 1=P123440CT-ND, Actuator Height off PCB, Vertical=0.60mm, Actuator Orientation="Top Actuated", Actuator Type=Standard, Circuit=SPST-NO, componentlink1description=Datasheet, componentlink1url=https://industrial.panasonic.com/ac/cdn/e/control/switch/light-touch/catalog/sw_lt_eng_3020s.pdf, componentlink2description="DigiKey Link", componentlink2url=https://www.digikey.com/en/products/detail/panasonic-electronic-components/EVP-AWED4A/8568275, Illumination=Non-Illuminated, Ingress Protection="IP67 - Dust Tight, Waterproof", lastupdated="29-12-2022 09:10:40 PM", Lifecycle Status=Active, Minimum Order=1, Mounting Type="Surface Mount", Outline="3.00mm x 2.00mm", packaging=TapeAndReel, Part Number=EVP-AWED4A, Part Status=Active, price=0.16, series=EVPAW, Supplier 1=DigiKey, Switch Function=Off-Mom, Termination Style="SMD (SMT) Tab"
U1B: library part CMP-0062-01645-3, "800mA Low-Dropout Linear Regulator, 4-pin SOT-223", manufacturer="National Semiconductor", PackageTopMarking=XYTT*N03A, PartNumber=LM1117MP-ADJ, PowerWise=N, Code_IPC=SOT223-4, Code_JEDEC=TO-261-AA, componentlink1description="Manufacturer URL", componentlink1url=http://www.national.com/, componentlink2description="LM1117 Datasheet", componentlink2url=http://www.national.com/ds/LM/LM1117.pdf, ComponentLink3Description="LM1117 Web Page", ComponentLink3URL=http://www.national.com/pf/LM/LM1117.html, ComponentLink4Description="MP04A Package Page", ComponentLink4URL=http://www.national.com/packaging/folders/mp04a.html, CompType="LDO IC", DatasheetVersion=Apr-2006, High-Reliability=Y, PackageDescription="Molded SOT-223, 6.50 x 3.56 x 1.6mm Body, 4 Lead, 2.3mm Pitch", PackageReference=MP04A, PackageVersion="revB, Apr-2003", PinCount=4, RevisionNote="SCH symbol layout adjusted", RoHS=N
U1C: Package=None, Availability=Unavailable, MP=CH340G, price=None
U1D: "Buffer, Non-Inverting 4 Element 1 Bit per Element 3-State Output 14-SOIC", Package="SOIC-14 STMicroelectronics", Availability=Unavailable, MF="Nexperia USA", MP=74HC125, price=None, SnapEDA_Link=https://www.snapeda.com/parts/74HC125/Nexperia%20USA%20Inc./view-part/560724/?ref=snap
Y1C: library part ABM10-167-12.000MHZ-T3, "CRYSTAL 12.00MHZ 8PF LOW ESR SMD", Device Package="4-SMD, No Lead", ESR (Equivalent Series Resistance)="125 Ohms", Frequency Stability=±30ppm, Frequency Tolerance=±10ppm, Load Capacitance=8pF, manufacturer="Abracon LLC", Operating Mode=Fundamental, Operating Temperature="-40°C ~ 85°C", Supplier Part Number 1=535-13521-1-ND, componentlink1description=Datasheet, componentlink1url=https://abracon.com/Resonators/ABM10-167-12.000MHz.pdf, componentlink2description="DigiKey Link", componentlink2url=http://digikey.com/product-detail/en/abracon-llc/ABM10-167-12.000MHZ-T3/535-13521-1-ND/6140274, Frequency=12MHz, Height - Seated (Max)="0.028\" (0.70mm)", lastupdated="19-03-2020 10:27:46 PM", Lifecycle Status=Active, Minimum Order=1, Mounting Type="Surface Mount", Package / Case="4-SMD, No Lead", packaging=TapeAndReel, Part Number=ABM10-167-12.000MHZ-T3, Part Status=Active, partid=284, price=0.28, series=ABM10, Size / Dimension="0.098\" L x 0.079\" W (2.50mm x 2.00mm)", Supplier 1=DigiKey, Type="MHz Crystal"

## Via types
v1: diameter 0.6, hole 0.3, Top Layer to Bottom Layer, tented both sides, 224 vias
v2: diameter 0.6, hole 0.3, Top Layer to Bottom Layer, 53 vias

## Nets (pads, with @x,y where several pads share a name; then routed paths per layer and width w, separated by ;. In a path a pad name is that pad's centre, name@x,y a point inside that pad or via, vN(x,y) a via of type N, cw(c..) or ccw(c..) an arc to the next point about the centre after c; other vN are vias at no path point)
Adjust: C2B.2 R1B.1 R2B.1 U1B.1 | length 7.6
  Top Layer w0.5: R2B.1 36.415,15.705 34.445,15.705 C2B.2 34.36,15.66 34.075,15.375 34.075,13.575 34.31,13.34 R1B.1 34.367,13.323 37.177,13.323 U1B.1
CH_PD: MOD1D.6 R3D.2 | length 4.4
  Top Layer w0.3: MOD1D.6 26.9,23.6 28.1,24.8 28.1,26.11 28.29,26.3 R3D.2
CLOCK_TTL: JP2D.2 R5D.1 | length 46.2
  Top Layer w0.3: v1(36.15,30.9) 36.207,30.843 36.207,29.44 R5D.1
  Bottom Layer w0.3: JP2D.2 0.783,31.18 0.602,31.362 0.602,34.052 3.425,36.875 14.429,36.875 14.734,36.57 24.914,36.57 25.348,37.004 28.6,37.004 29.708,35.896 33.207,35.896 36.15,32.953 v1(36.15,30.9)
DATA_TTL: JP1D.2 R4D.1 | length 32.3
  Top Layer w0.3: v1(33.6,33.075) 33.612,33.087 34.923,33.087 R4D.1
  Bottom Layer w0.3: JP1D.2 5.825,35.896 6.067,36.138 14.459,36.138 14.527,36.07 25.121,36.07 25.555,36.504 28.393,36.504 29.501,35.396 33,35.396 33.6,34.796 v1(33.6,33.075)
DTS: Q2C.2 R5C.1 U1C.13 | length 26.1
  Top Layer w0.3: v1(10.9,4.7) 10.376,4.7 10.06,4.384 Q2C.2 10.21,3.65 12.01,3.65 R5C.1 ; v1(24.7,12.8) 24.717,12.818 27.482,12.818 U1C.13
  Bottom Layer w0.3: v1(10.9,4.7) 10.9,8 11.6,8.7 16.1,8.7 20.3,12.9 22.409,12.9 22.509,12.8 v1(24.7,12.8)
FUSED_LED: D3A.2 F2A.1 | length 3.8
  Top Layer w1: D3A.2 v2(31.2,37.9) 34.75,37.9 F2A.1
  other v2: 32.3,36.6 34,36.6 35.7,36.6 29.9,36.7 34.9,37.8 33.1,37.9 30,38 32.349,38.915 34.1,38.9 35.7,38.9 30,39.4 31.2,39.4
FUSED_VCC: D1A.2 D2A.2 F1A.1 | length 5.4
  Top Layer w1: F1A.1 20.825,31.025 D1A.2 D2A.2
GND: C1A.2 C1B.1 C1C.1 C1D.2 C2A.1 C2B.1 C2C.1 C2D.2 C3B.2 C3C.1 C3D.1 C4C.1 C4D.1 C5C.2 C5D.1 C6C.1 C6D.1 C7C.2 D1B.K D1C.2 D4A.K H1A.1 H2A.1 H3A.1 H4A.1 J1A.4 J1C.A1B12 J1C.B1A12 J1C.SH J2A.1 MOD1D.1 R1C.2 R2A.2 R2B.2 R2C.2 R3D.1 SW1D.2 SW2D.2 U1C.1 U1D.1 U1D.4 U1D.7 U1D.10 U1D.13 Y1C.2 Y1C.4 | length 38.8
  Top Layer w0.3: U1D.10 10.55,30.775 v1(11,30.325) ; U1D.13 v1(11.05,32.725)
  Top Layer w0.5: v1(1.6,24.4) 1.619,24.381 1.619,23.191 R2C.2 ; v1(6,24.3) 6,24.273 6.107,24.166 C1C.1 ; J1C.B1A12 7.502,12.398 7.502,11.373 v1(7.504,11.371) ; J1C.A1B12 v1(7.5,19.8) ; D4A.K v1(8.6,43.9) ; C5C.2 9.981,7.571 9.981,8.481 v1(10,8.5) ; Y1C.2 12.455,7.125 12.748,7.125 12.873,7 v1(12.9,7) ; C5D.1 13.492,34.879 v1(13.844,35.232) 13.863,35.213 14.225,35.213 14.842,34.596 C6D.1 ; Y1C.4 14.548,6.025 14.673,5.9 v1(14.7,5.9) ; v1(15.4,19.7) C2C.1 ; C7C.2 16.181,5.729 16.181,4.919 v1(16.2,4.9) ; C3D.1 19.981,28.321 19.981,29.181 v1(20,29.2) ; v1(22.2,29.2) 22.2,29.173 22.25,29.123 C4D.1 ; v1(27.2,35.8) 27.219,35.819 27.719,35.819 28.05,36.15 C2A.1 ; v1(28,44.1) 28,44.073 28.05,44.023 R2A.2 ; R3D.1 30.795,26.305 30.795,27.068 31,27.273 v1(31,27.3) ; D1B.K 31.775,34.554 32.846,34.554 v1(32.85,34.55) ; v1(32.725,1.564) 32.732,1.572 32.732,2.76 C1D.2 ; v1(33.204,6.925) 33.231,6.925 33.266,6.96 C1B.1 ; C2B.1 35.733,17.24 35.773,17.2 v1(35.8,17.2) ; R2B.2 39.023,15.75 39.373,16.1 v1(39.4,16.1)
  Bottom Layer w0.5: v1(28,44.1) 29.763,44.1 30.067,44.404 36.833,44.404 37.137,44.1 v1(38.4,44.1)
  other v1: 16.6,0.9 19.594,1.594 21.094,1.594 22.594,1.594 24.094,1.594 25.594,1.594 27.094,1.594 28.594,1.594 31.594,1.594 37.594,1.594 35.344,3.094 36.844,3.094 21.094,4.594 12.2,4.9 9.543,4.913 37.2,5.3 6.923,5.613 18.844,6.094 23.344,6.094 24.844,6.094 26.344,6.094 27.844,6.094 43.892,7.363 1.594,7.594 30.094,7.594 24.5,8.6 25.8,8.6 30.844,9.094 25.9,9.6 29.1,9.7 23.6,10.3 4.594,10.594 30.094,10.594 23.6,11.4 24.7,11.5 30.4,11.7 31.8,11.9 2.344,12.094 29.344,12.094 5.1,12.1 31.7,13.1 39.2,13.1 1.594,13.594 3.094,13.594 15.2,13.6 40,13.8 6,14.2 23.6,14.9 24.7,14.9 2.344,15.094 1.594,16.594 3.094,16.594 38,17.4 2.344,18.094 29.2,18.1 36.844,18.094 35.4,18.6 5.2,19 1.594,19.594 3.094,19.594 16.594,19.594 31.7,19.6 36.094,19.594 35.3,20.8 31.011,21.661 42.094,22.594 43.594,22.594 18.844,24.094 41.344,24.094 42.844,24.094 3.094,25.594 18.094,25.594 37.594,25.594 39.094,25.594 40.594,25.594 42.094,25.594 43.594,25.594 2.344,27.094 17.344,27.094 38.344,27.094 42.844,27.094 5.535,28.163 1.594,28.594 43.594,28.594 27.7,29.7 27.8,30.7 37.594,31.594 39.094,31.594 43.594,31.594 25.1,32 28,32 22.6,32.2 24,32.2 19.8,37.3 24.5,37.3 1.594,37.594 19.9,38.3 24.7,38.6 6.844,39.094 10.594,40.594 11.344,42.094 12.844,42.094 10.594,43.594 12.094,43.594
  other v2: 23.6,13.7 24.7,13.7
GPIO0: MOD1D.3 Q2C.3 R2D.2 U1D.12 | length 60.6
  Top Layer w0.3: v1(7.8,5.2) 7.8,5.119 7.95,4.969 7.95,2.64 Q2C.3 ; R2D.2 7.994,26.25 8.9,26.25 v1(8.925,26.275) ; U1D.12 7.426,32.075 7.25,31.899 7.25,28.65 8.925,26.975 v1(8.925,26.275) ; MOD1D.3 22.872,22.358 19.142,22.358 15.3,26.2 12.191,26.2 12.116,26.275 v1(8.925,26.275)
  Bottom Layer w0.3: v1(7.8,5.2) 7.8,5.804 7.804,5.808 7.804,6.392 7.8,6.396 7.8,7.4 10.4,10 15.4,10 16.6,11.2 16.6,13.252 8.925,20.927 v1(8.925,26.275)
GPIO0_LED_TTL: JP2D.1 U1D.11 | length 12.2
  Top Layer w0.3: U1D.11 9.538,31.45 11.375,31.45 v1(11.4,31.475)
  Bottom Layer w0.3: JP2D.1 3.438,32.18 3.736,32.479 7.026,32.479 8.03,31.475 v1(11.4,31.475)
GPIO2: MOD1D.2 U1D.9 | length 26
  Top Layer w0.3: U1D.9 8.101,30.125 7.925,29.949 7.925,28.725 8.325,28.325 v1(15.45,28.325)
  Bottom Layer w0.3: v1(15.45,28.325) 18.216,28.325 18.366,28.475 21.051,28.475 25.468,24.058 25.468,22.302 MOD1D.2
GPIO2_LED_TTL: JP1D.1 U1D.8 | length 12.7
  Top Layer w0.3: U1D.8 11.475,29.475 v1(11.9,29.05)
  Bottom Layer w0.3: JP1D.1 9.358,35.413 12.104,32.667 12.104,30.625 11.9,30.421 v1(11.9,29.05)
LDO+3.3V: C2D.1 C3D.2 C4D.2 F1B.2 MOD1D.8 R3B.1 | length 17.7
  Top Layer w0.5: C3D.2 C4D.2 ; MOD1D.8 21.8,23.77 21.8,24.9 22.25,25.35 C4D.2 ; R3B.1 30.36,30.16 F1B.2 30.15,29.93 29.5,29.28 29.48,29.28 27.11,26.91 C2D.1 25.4,26.81 22.35,26.81 C4D.2
LDO-OUT-1117: C3B.1 F1B.1 R1B.2 R1D.2 U1B.2 U1B.4 | length 23.3
  Top Layer w0.5: v1(30.102,5.764) 30.105,5.762 30.105,4.419 R1D.2 ; R1B.2 34.39,11.76 35.25,10.9 37.087,10.9 U1B.2 U1B.4
  Bottom Layer w0.5: v1(30.102,5.764) 35.88,5.764 36.796,6.68 38.611,6.68 39.3,7.369 v1(39.3,10.4)
  other v1: 40.7,10.4 39.3,11.6 40.7,11.6 43.9,11.6 41.783,13.805 42.883,13.805 43.983,13.805 41.783,15.105 42.883,15.105 43.983,15.105 42.3,16.2 43.5,16.2 41.3,17.3 43.9,17.9 42.9,18.9 41.8,20.3 37.7,20.4 38.7,21.2 36.5,21.7 37.5,22.5 35.3,22.9 36.3,23.5 33.7,24.6 35.1,25.1 32.575,25.775 34.075,26.275 34.05,28 32.425,28.1 32.625,30.575 34.15,30.625
  other v2: 41.8,9.1 43,9.1 44.1,9.1 41.8,10.3 42.9,10.3 44,10.3 41.8,11.6 42.9,11.6 41.8,12.7 42.9,12.7 44,12.7
LED-OUT: F2A.2 J1A.1 | length 9.8
  Top Layer w1: F2A.2 36.1,40.8 37.7,39.2 37.7,36.34 38.324,35.716 J1A.1
  other v1: 38.9,38.1 33.6,43.4 35.1,43.4 36.7,43.4
  other v2: 33.6,40.7 35,40.7 36.6,40.7 33.6,42.1 35,42.1 36.6,42.1
LED_CLOCK_OUT: J1A.3 R5D.2 | length 5.8
  Top Layer w0.3: R5D.2 36.337,27.851 36.936,27.851 39.507,30.422 40.692,30.422 J1A.3
LED_DATA_OUT: J1A.2 R4D.2 | length 4.4
  Top Layer w0.3: R4D.2 36.553,33.138 40.868,33.138 J1A.2
NetC6C_2: C6C.2 U1C.4 | length 3.5
  Top Layer w0.393: C6C.2 18.573,12.868 21.967,12.868 U1C.4
NetD1B_A: D1B.A R3B.2 | length 2.7
  Top Layer w0.3: D1B.A 30.771,33.829 31.2,33.4 31.7,33.4 31.94,33.16 R3B.2
NetD4A_A: D4A.A R1A.2 | length 2
  Top Layer w0.3: R1A.2 ccw(c8.55,39.39) 8.6,39.39 D4A.A
NetJ1C_A5: J1C.A5 R2C.1 | length 10.2
  Top Layer w0.3: R2C.1 4.024,23.15 4.2,22.974 4.2,17.3 4.65,16.85 J1C.A5
NetJ1C_B5: J1C.B5 R1C.1 | length 10.2
  Top Layer w0.3: R1C.1 7.25,7.95 9.4,10.1 9.4,13.5 9.05,13.85 7.988,13.85 J1C.B5
NetQ1C_1: Q1C.1 R5C.2 | length 1.5
  Top Layer w0.3: R5C.2 Q1C.1
NetQ2C_1: Q2C.1 R6C.2 | length 2.2
  Top Layer w0.3: Q2C.1 10.876,1.6 11.151,1.875 12.135,1.875 R6C.2
NetR2D_1: R2D.1 SW2D.1 | length 2.1
  Top Layer w0.3: SW2D.1 4.375,26.325 4.5,26.2 6.364,26.2 R2D.1
RST: C1D.1 MOD1D.7 Q1C.3 R1D.1 SW1D.1 | length 44.3
  Top Layer w0.3: Q1C.3 17.317,2.843 30.101,2.843 R1D.1 30.114,2.842 31.208,2.842 31.383,3.018 31.383,4.171 31.559,4.347 C1D.1 ; MOD1D.7@24.17,23.4 25.468,22.102 25.468,20.346 26.914,18.9 31.2,18.9 32.504,17.596 32.504,11.133 32.5,11.13 32.5,4.586 C1D.1 ; SW1D.1 35.195,4.368 32.76,4.368 C1D.1
RTS: Q1C.2 R6C.1 U1C.14 | length 20.8
  Top Layer w0.3: R6C.1 13.765,1.875 15.265,1.875 15.29,1.85 16.55,1.85 v1(16.6,1.8) ; v1(25.7,14.1) 25.703,14.103 27.497,14.103 U1C.14
  Bottom Layer w0.3: v1(16.6,1.8) 25.7,10.9 v1(25.7,14.1)
RX_LED_TTL: JP1D.3 U1D.3 | length 6.3
  Top Layer w0.3: v1(3.575,35.45) 3.025,35.45 2.55,34.975 2.55,32.355 2.755,32.15 3.562,32.15 U1D.3
  Bottom Layer w0.3: v1(3.575,35.45) 3.594,35.431 4.782,35.431 JP1D.3
RXD_TXD_N: R3C.1 U1C.3 | length 4.8
  Top Layer w0.332: R3C.1 18.824,15.384 18.824,15.739 19.019,15.934 19.294,15.934 19.897,15.33 19.897,15.326 20.725,14.499 21.316,14.499 21.511,14.304 21.511,14.249 21.655,14.105 U1C.3
RXD_TXD_P: R4C.1 U1C.2 | length 4.8
  Top Layer w0.332: R4C.1 18.824,16.966 18.824,16.611 19.019,16.416 19.494,16.416 20.38,15.53 20.38,15.526 20.925,14.981 21.316,14.981 21.511,15.176 21.511,15.231 21.655,15.375 U1C.2
SUPPLY_IN: C1A.1 C2A.2 D1A.1 D3A.1 J2A.2 R1A.1 R2A.1 | length 35.8
  Top Layer w1: R1A.1 8.56,37.75 8.82,37.75 8.89,37.68 14.434,37.68 15.02,38.266 J2A.2 16.45,40.05 17.65,41.25 C1A.1 27.91,41.25 R2A.1@28.05,41.39 ; J2A.2@15.02,39.675 17.675,37.02 D1A.1 ; C2A.2 R2A.1@28.05,41.39 ; D3A.1 30.9,42.2 30.05,42.2 29.26,41.41 R2A.1 R2A.1@28.05,41.39
  other v1: 15,37.3 18.2,37.4 16.6,37.5 28.56,38.255 27.54,38.269 18.2,38.7 16.8,38.9 24.8,40 26.8,40 18.3,40.1 20.3,40.1 28.7,40.7 14.5,42.2 16.5,42.2 18.2,42.4 20.4,42.4 24.7,42.4 26,42.4 22.5,42.8
  other v2: 30,40.9 31.1,41 32.2,41 29.886,42.036 31.1,42.2 32.3,42.2 29.9,43.3 32.1,43.4 31.1,43.6
TX_LED_TTL: JP2D.3 U1D.6 | length 6.8
  Top Layer w0.3: U1D.6@3.505,30.05 3.608,30.154 U1D.6 3.693,30.069 4.606,30.069 v1(5.55,29.125)
  Bottom Layer w0.3: JP2D.3 2.693,29.125 v1(5.55,29.125)
TXD_RXD_N: MOD1D.4 R4C.2 U1D.2 | length 43
  Top Layer w0.332: 15.358,16.418 16.163,16.418 16.165,16.416 16.481,16.416 16.676,16.611 16.676,16.966 R4C.2
  Top Layer w0.393: U1D.2 5.107,32.725 5.81,32.022 5.81,31.815 v1(5.85,31.775)
  Bottom Layer w0.332: v1(5.85,31.775) 5.85,31.703 5.664,31.517 5.664,31.055 7.935,28.784 7.97,28.784 10.582,26.172 10.582,20.613 14.613,16.581 15.077,16.581 v1(15.1,16.604) 15.172,16.604 15.358,16.418 23.486,16.418 26.58,19.512 26.58,19.787 26.385,19.982 22.708,19.982 MOD1D.4
TXD_RXD_P: MOD1D.5 R3C.2 U1D.5 | length 44.1
  Top Layer w0.332: 15.358,15.936 15.963,15.936 15.965,15.934 16.481,15.934 16.676,15.739 16.676,15.384 R3C.2
  Top Layer w0.393: U1D.5 3.665,30.803 4.539,30.803 4.996,31.261 v1(4.996,31.775)
  Bottom Layer w0.332: v1(4.996,31.775) 4.996,31.703 5.182,31.517 5.182,30.855 7.735,28.302 7.77,28.302 10.099,25.972 10.099,20.413 14.413,16.099 14.734,16.099 15.082,15.75 v1(15.1,15.75) 15.172,15.75 15.358,15.936 23.686,15.936 27.062,19.312 27.062,19.887 27.788,20.613 27.788,21.507 27.384,21.911 27.384,22.555 27.745,22.916 28.566,22.916 MOD1D.5
USB_2.0_N: D1C.6 J1C.A7 J1C.B7 U1C.6 | length 24.7
  Top Layer w0.332: J1C.B7 7.516,16.334 8.163,16.334 9.1,15.397 v1(9.1,14.7) 8.45,15.35 J1C.A7@7.884,15.35 ; D1C.6 12.85,12.114 13.045,12.309 13.52,12.309 13.648,12.437 14.018,12.437 14.345,12.11 ; 14.71,11.745 15.766,10.689 21.316,10.689 21.511,10.494 21.511,10.439 21.655,10.295 U1C.6
  Bottom Layer w0.332: v1(9.1,14.7) 8.579,15.221 8.351,15.221 8.027,15.545 8.027,15.821 8.222,16.015 10.44,16.015 14.345,12.11 14.345,11.847 v1(14.396,11.796)
USB_2.0_P: D1C.1 J1C.A6 J1C.B6 U1C.5 | length 24.8
  Top Layer w0.332: J1C.B6 6.703,14.85 v1(6.202,15.35) 6.702,15.85 J1C.A6 ; D1C.1 12.85,12.986 13.045,12.791 13.32,12.791 13.448,12.919 14.218,12.919 14.686,12.451 ; 15.051,12.086 15.966,11.171 21.316,11.171 21.511,11.366 21.511,11.421 21.655,11.565 U1C.5
  Bottom Layer w0.332: v1(6.202,15.35) 7.35,15.35 7.545,15.545 7.545,16.02 8.022,16.498 10.64,16.498 14.686,12.451 14.949,12.451 v1(15,12.4)
VBUS: C2C.2 C3C.2 C4C.2 D1C.5 D2A.1 FB1C.2 U1C.16 | length 63
  Top Layer w0.5: v1(14,24.8) 13.981,24.781 13.981,24.409 12.472,22.901 FB1C.2 12.536,22.787 13.8,22.787 C2C.2 16.413,22.787 20.825,18.375 22.217,18.375
  Top Layer w0.512: D1C.5 11.856,11.344 11.856,11.889 11.27,12.475 10.78,12.475 10.1,13.155 10.1,16.697 12.472,19.069 FB1C.2 ; 22.217,18.375 23.125,18.375 24.855,16.645 U1C.16 27.527,16.673 29.586,16.673 C4C.2 29.813,16.5 C3C.2
  Top Layer w1: D2A.1 28.05,33.75 v1(28.3,34)
  Bottom Layer w0.5: v1(14,24.8) 14,24.827 13.7,25.127 13.7,32.8 14.9,34 v1(28.3,34)
  other v1: 13.8,22.8 14.1,23.7 13.3,24.3 13.3,25.2 28.7,33.2 25.7,33.3 27.1,33.4 25.7,34.7 27.1,34.7 28.7,34.8
VBUS_IN: C1C.2 FB1C.1 J1C.A4B9 J1C.B4A9 | length 23
  Top Layer w0.5: v1(5.1,13.2) v1(6.2,13.2) J1C.B4A9 8.473,13.2 8.573,13.1 v1(8.6,13.1) ; v1(5.1,18) J1C.A4B9 8.6,18 10.621,20.021 FB1C.1 10.461,23.01 C1C.2@7.687,23.01
  Bottom Layer w0.5: v1(5.1,13.2) 5.096,13.204 5.096,17.996 v1(5.1,18) ; v1(6.2,13.2) 7.9,13.2 8,13.1 v1(8.6,13.1)
VCC: C1B.2 C5D.2 C6D.2 F1A.2 U1B.3 U1D.14 | length 48.4
  Top Layer w0.5: 9.553,33.6 9.553,34.586 9.846,34.879 C5D.2 11.294,34.839 11.514,34.619 11.554,34.619 12.973,33.2 14.698,33.2 C6D.2 ; v2(15.2,31) v2(16.76,31) v2(17.8,31) ; C1B.2 34.483,8.623 37.11,8.623 U1B.3 v1(37.2,8.7)
  Bottom Layer w0.5: v2(15.2,31) v2(16.76,31) v2(18.9,31) 23.748,31 33.493,21.255 33.493,10.507 34.766,9.234 v2(35.608,9.234)
  other v1: 33.593,8.359 33.675,9.233 16,30.3
  other v2: 38.12,7.849 36.279,7.858 38.2,9.2 16.8,29.8 18.8,29.9 18.75,32.025 16.875,32.075
XI-XO_N: C5C.1 U1C.7 Y1C.3 | length 16.4
  Top Layer w0.332: C5C.1 9.982,5.992 12.273,5.992 Y1C.3 12.255,6.025 11.539,6.741 11.539,7.806 11.582,7.849 11.582,8.661 12.059,9.139 16.834,9.139 17.342,8.631 21.316,8.631 21.511,8.826 21.511,8.881 21.655,9.025 U1C.7
XI-XO_P: C7C.1 U1C.8 Y1C.1 | length 15.2
  Top Layer w0.332: C7C.1 16.118,7.307 13.988,7.307 Y1C.1 13.905,7.275 13.189,7.991 12.259,7.991 12.064,8.186 12.064,8.461 12.259,8.656 16.635,8.656 17.142,8.149 21.316,8.149 21.511,7.954 21.511,7.899 21.655,7.755 U1C.8
pads on no net: D1C.3 D1C.4 J1C.A8 J1C.B8 U1C.9 U1C.10 U1C.11 U1C.12 U1C.15

## Polygon pours and split planes (outlines as drawn)
VCC on Top Layer "TOP_VCC_1" (solid, pour order 30): 12.825,32.725 12.825,33 12.675,33 11.425,34.25 10.775,34.25 10.775,34.578 10.25,34.578 10.25,33.475 8.65,33.475 8.65,35.675 11.792,35.675 12.028,35.439 12.028,34.405 12.902,33.53 15.6,33.53 15.6,32.75 15.85,32.5 19.2,32.5 19.2,29.5 15.5,29.5 15.5,30.5 14.2,30.5 14.2,32.4 13.875,32.725
VBUS on Top Layer "TOP_VBUS_1" (solid, pour order 32): 21.5,19 24,19 24,18.5 24.5,18 25,17.5 30.4,17.5 30.4,14 29.15,14 29.15,16 24.3,16 23,17.3 23,17.8 20.673,17.8 16.973,21.5 16.5,21.5 16.5,22 13.608,22 13,21.392 13,18.4 10.6,16 10.6,15 9.696,15 9.696,16.996 11.745,19.045 11.745,25.5 15.4,25.5 15.4,24 16.5,24 16.5,23.5 17,23.5
VCC on Top Layer "TOP_VCC_2" (solid, pour order 28): 35.992,9.521 38.648,9.521 38.648,7.432 36,7.432 36,8 33.5,8 33.5,9.5
VBUS_IN on Top Layer "TOP_VBUS_IN" (solid, pour order 29): 11.5,19.5 11,19.5 9.219,17.719 8.037,17.719 4.519,17.719 4.5,17.7 4.5,18.3 6.95,18.3 8.3,18.3 9.5,19.5 9.5,22.5 6.985,22.5 6.985,24 11.5,24
VBUS on Top Layer "TOP_VBUS_2" (solid, pour order 27): 25.3,35 28.9,35 28.9,33 25.3,33
LED-OUT on Top Layer "TOP_LED_OUT" (solid, pour order 34): 33,39.5 33,45 37.5,45 37.5,40.3 40.4,37.4 45,37.4 45,34.6 36.4,34.6 36.4,39.5
LDO+3.3V on Top Layer "TOP_LED+3.3V" (solid, pour order 33): 27.5,26 27.5,26.5 27.7,26.5 29,27.8 29,28.1 31.5,28.1 31.5,33.5 29,33.5 29,31 28.5,31 28.5,29 27.5,29 27,28.5 24,28.5 23.48,27.98 23.48,27.57 19.225,27.57 19.225,26
LDO-OUT-1117 on Top Layer "TOP_LDO_OUT" (solid, pour order 35): 35.997,11.997 35.997,10 41,10 41,8.5 45,8.5 45,18 42,21 40,21 34.625,26.375 34.625,31.3 32,31.3 32,28.5 32,25.5 41,16.5 41,11.988
FUSED_LED on Top Layer "TOP_FUSED_LED" (solid, pour order 31): 29.5,39.8 32.49,39.8 32.49,39.3 36,39.3 36,36 29.5,36
SUPPLY_IN on Top Layer "TOP_SUPPLY_IN" (solid, pour order 36): 14,38.3 14,45 32.5,45 32.5,40.5 29,40.5 29,37.5 27,37.5 27,39.5 18.6,39.5 18.6,34.9 18.6,33 16.8,33 16.8,36.6 7.6,36.6 7.6,38.3
GND on Top Layer "TOP_GND" (solid, remove dead copper, pour order 37): 0.3,2.7 0.3,41.7 cw(c3.3,41.7) 3.3,44.7 42.3,44.7 cw(c42.3,41.7) 45.3,41.7 45.3,2.7 cw(c42.3,2.7) 42.3,-0.3 3.3,-0.3 cw(c3.3,2.7)
FUSED_LED on Bottom Layer "BOT_FUSED_LED" (solid, pour order 39): 29.5,39.8 32.49,39.8 32.49,39.3 36,39.3 36,36 29.5,36
LDO-OUT-1117 on Bottom Layer "BOT_LDO-OUT" (solid, pour order 44): 35.997,11.997 35.997,10 41,10 41,8.5 45,8.5 45,18 42,21 40,21 34.65,26.35 34.65,31.125 32,31.125 32,28.5 32,25.5 41,16.5 41,11.988
VBUS on Bottom Layer "BOT_VBUS_2" (solid, pour order 42): 13,34 14,35 28.9,35 28.9,33 14.6,33 14.3,32.7 14.3,27.2 14.6,26.9 14.6,21.5 13,21.5
VBUS_IN on Bottom Layer "BOT_VBUS_IN" (solid, pour order 41): 8.3,18.3 9.5,19.5 9.6,19.5 10.3,18.8 9.2,17.7 5.5,17.7 5.5,13.5 8.5,13.5 8.5,12.8 4.3,12.8 4.3,18.3 5.5,18.3
VCC on Bottom Layer "BOT_VCC_2" (solid, pour order 43): 32.8,8 32.8,21.2 23.5,30.5 14.6,30.5 14.6,32.5 18.8,32.5 19.7,31.6 24.2,31.6 34.2,21.6 34.2,10.9 35.437,9.663 38.6,9.663 38.6,7.422 35.678,7.422 35.1,8
LED-OUT on Bottom Layer "BOT_LED-OUT" (solid, pour order 40): 33,39.5 33,44 37.5,44 37.5,40.3 40.2,37.6 43,37.6 43,34.6 36.4,34.6 36.4,39.5
SUPPLY_IN on Bottom Layer "BOT_SUPPLY_IN" (solid, pour order 38): 26.5,43.6 26.5,42.4 28.9,42.4 29,42.5 29,44 32.5,44 32.5,40.5 29,40.5 29,37.5 27,37.5 27,39.5 18.6,39.5 18.6,36.6 14,36.6 14,43.6
GND on Bottom Layer "BOT_GND" (solid, remove dead copper, pour order 45): 0,3 0,42 cw(c3,42) 3,45 42,45 cw(c42,42) 45,42 45,3 cw(c42,3) 42,0 3,0 cw(c3,3)

## Silkscreen, mask and mechanical layers (free items; w line width, h text height)
Top Overlay:
  lines w0.254: 18.35,11.4 18.35,11.444 ; 18.35,19.35 18.35,25.1 ; 32.75,6.984 32.75,25.1
Mechanical 15:
  the board outline again, w0.16

## Text inside footprints (layer, text, board x,y; h text height)
C1A: Top Overlay "+" at 21.1,40.95 h2 r90
C3B: Top Overlay "+" at 38.65,19.5 h2 r90
J1C: Mechanical 13 "PCB EDGE" at 0.975,16.616 h0.25 r270
MOD1D: Mechanical 13 "CUTOUT POLYGON" at 32.15,1.7 h0.25 r180; Mechanical 13 "ANTENNA AREA" at 32.15,1.2 h0.25 r180